# EAGLE board tube_pcb (EAGLE 7.7.0)
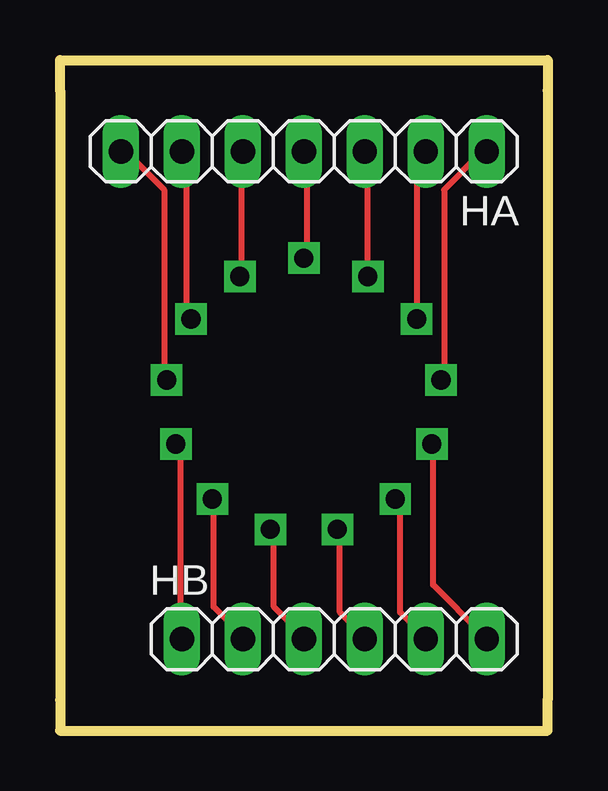
[diagram p0: board, top side]

Size 20.32 x 27.94 mm. Coordinates in mm from the lower left corner, seen from the top.
Outline: 20.32,26.67 20.32,1.27 20.32,0 0,0 0,1.27 0,26.67 0,27.94 20.32,27.94 20.32,26.67
Copper layers (1*16): Top 0.035mm / dielectric 1.5mm / Bottom 0.035mm
Design rules "default": minimum track width 10mil, minimum drill 24mil, track to track 8mil, track to pad 8mil, pad to pad 8mil, via to via 8mil, smd to smd 8mil, copper to edge 40mil, drill to drill 8mil, minimum pad ring 10mil, minimum via ring 8mil, stop-mask expansion 4mil, vias tented up to drill 0mil, thermal gap 10mil

## Footprints (pad centres in the part's own frame; a part is rotated, then mirrored left to right if it is on the bottom)
1X07 = drill 1.016 long: 1 -7.62,0; 2 -5.08,0; 3 -2.54,0; 4 0,0; 5 2.54,0; 6 5.08,0; 7 7.62,0
1X06 = drill 1.016 long: 1 -6.35,0; 2 -3.81,0; 3 -1.27,0; 4 1.27,0; 5 3.81,0; 6 6.35,0
IN14 = drill 0.8 square: 0 12.319,9.525; 1 2.921,9.525; 2 1.905,6.985; 3 2.286,4.318; 4 3.81,2.032; 5 6.223,0.762; 6 9.017,0.762; 7 11.43,2.032; 8 12.954,4.318; 9 13.335,6.985; A 7.62,12.065; D1 10.287,11.303; D2 4.953,11.303

## Placement (x,y rotation side)
HA  [1X07]  10.16,24.13 180 top
HB  [1X06]  11.43,3.81 0 top
U$1  IN14  [IN14]  2.54,7.62 0 top

## Library data of the parts
HA HB = pinhead
U$1 = my_library

## Nets
0: HA.2 U$1.0
1: HA.6 U$1.1
2: HA.7 U$1.2
3: HB.1 U$1.3
4: HB.2 U$1.4
5: HB.3 U$1.5
6: HB.4 U$1.6
7: HB.5 U$1.7
8: HB.6 U$1.8
9: HA.1 U$1.9
A: HA.4 U$1.A
D1: HA.3 U$1.D1
D2: HA.5 U$1.D2

## Tracks (layer width: path | path; a pad name or v marks a point on that pad's centre or on a via)
0
  Top 0.254: U$1.0 14.86,23.9 15.09,24.13 HA.2
1
  Top 0.254: U$1.1 5.26,17.27 5.26,24.13 HA.6
2
  Top 0.254: U$1.2 4.34,14.76 4.34,22.53 2.74,24.13 HA.7
3
  Top 0.254: U$1.3 5.03,11.79 5.03,4.01 HB.1
4
  Top 0.254: U$1.4 6.4,9.5 6.4,5.16 7.54,4.01 HB.2
5
  Top 0.254: U$1.5 8.91,8.36 8.91,5.16 10.06,4.01 HB.3
6
  Top 0.254: U$1.6 11.66,8.36 11.66,4.93 12.57,4.01 HB.4
7
  Top 0.254: U$1.7 14.17,9.5 14.17,4.93 15.09,4.01 HB.5
8
  Top 0.254: U$1.8 15.54,11.79 15.54,6.07 17.6,4.01 HB.6
9
  Top 0.254: U$1.9 16,14.76 16,22.53 17.6,24.13 HA.1
A
  Top 0.254: U$1.A 10.29,19.79 10.29,24.13 HA.4
D1
  Top 0.254: U$1.D1 12.8,19.1 12.8,24.13 HA.3
D2
  Top 0.254: U$1.D2 7.54,19.1 7.54,24.13 HA.5